# Altium PCB TLE5012.PcbDoc
Units mil, origin at the board's own origin, x right, y up, seen from the top; angles counter-clockwise.
Board outline 1434.62 x 1434.62 mil, 2 copper layers (Top Layer, Bottom Layer); 8 components, 9 nets, 32 pads, 2 vias.
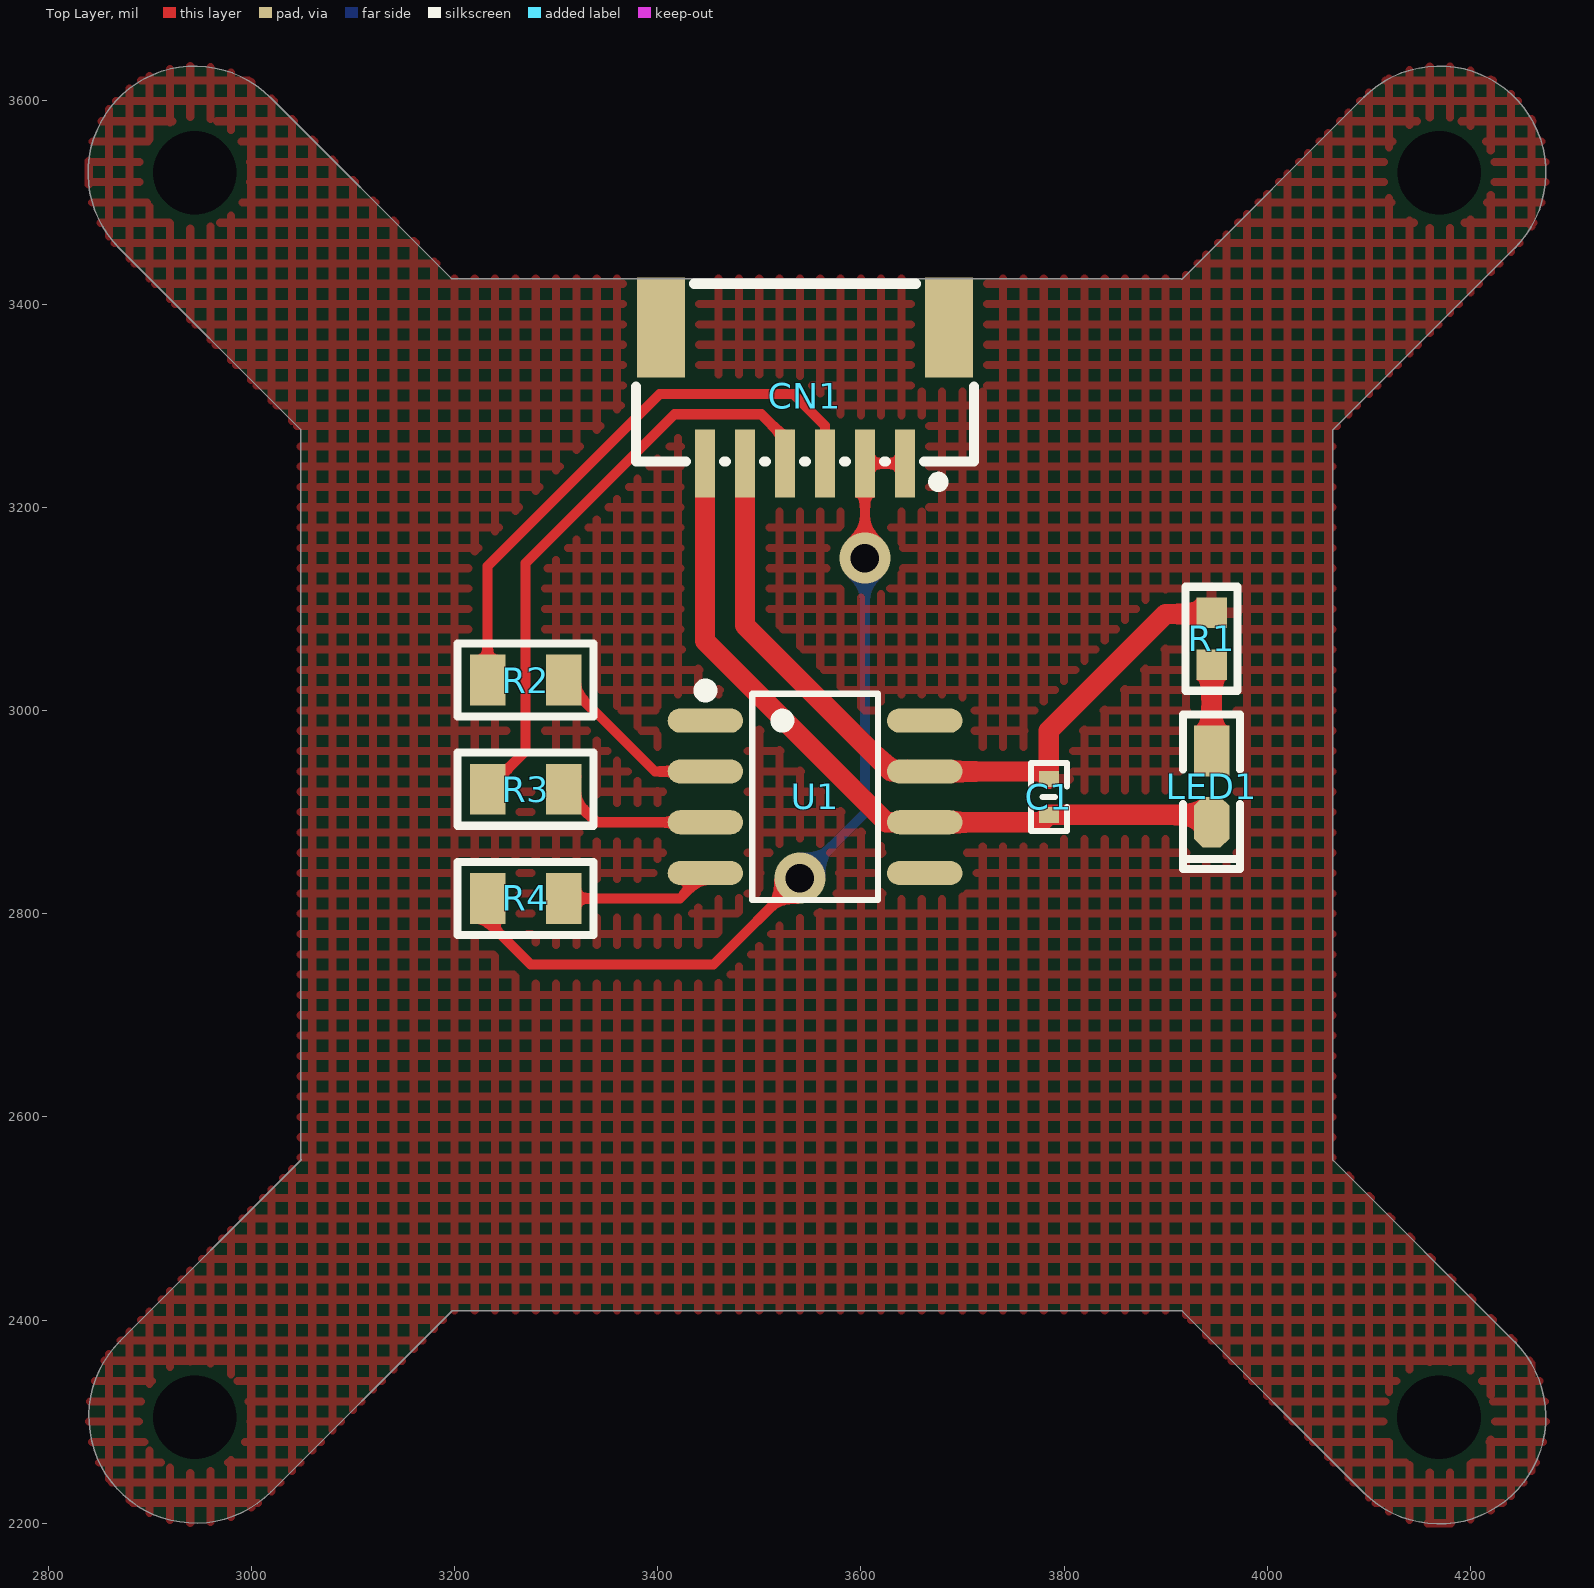
[diagram p0: Top Layer view]
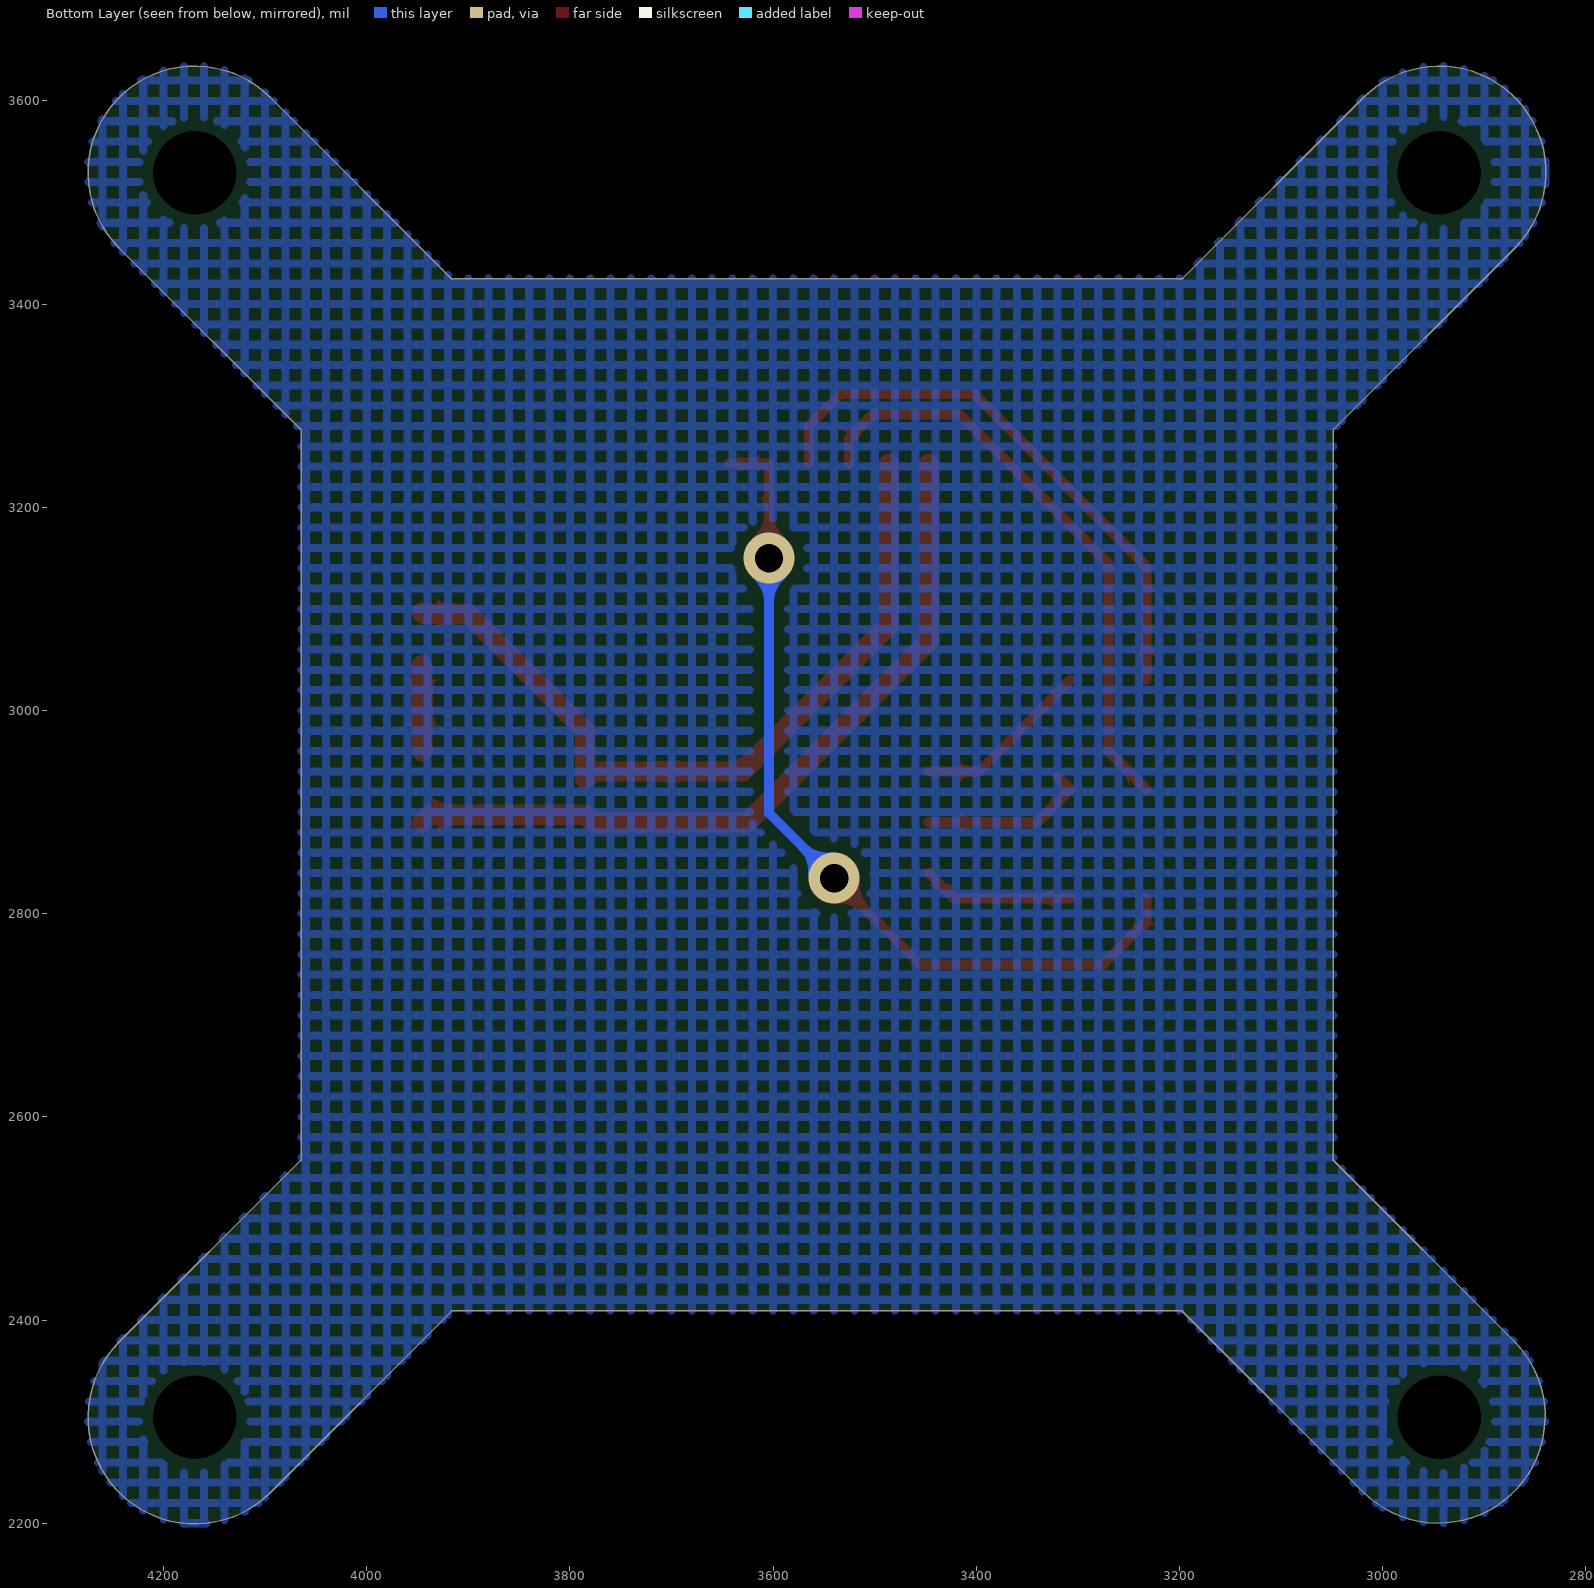
[diagram p1: Bottom Layer view, seen from below]
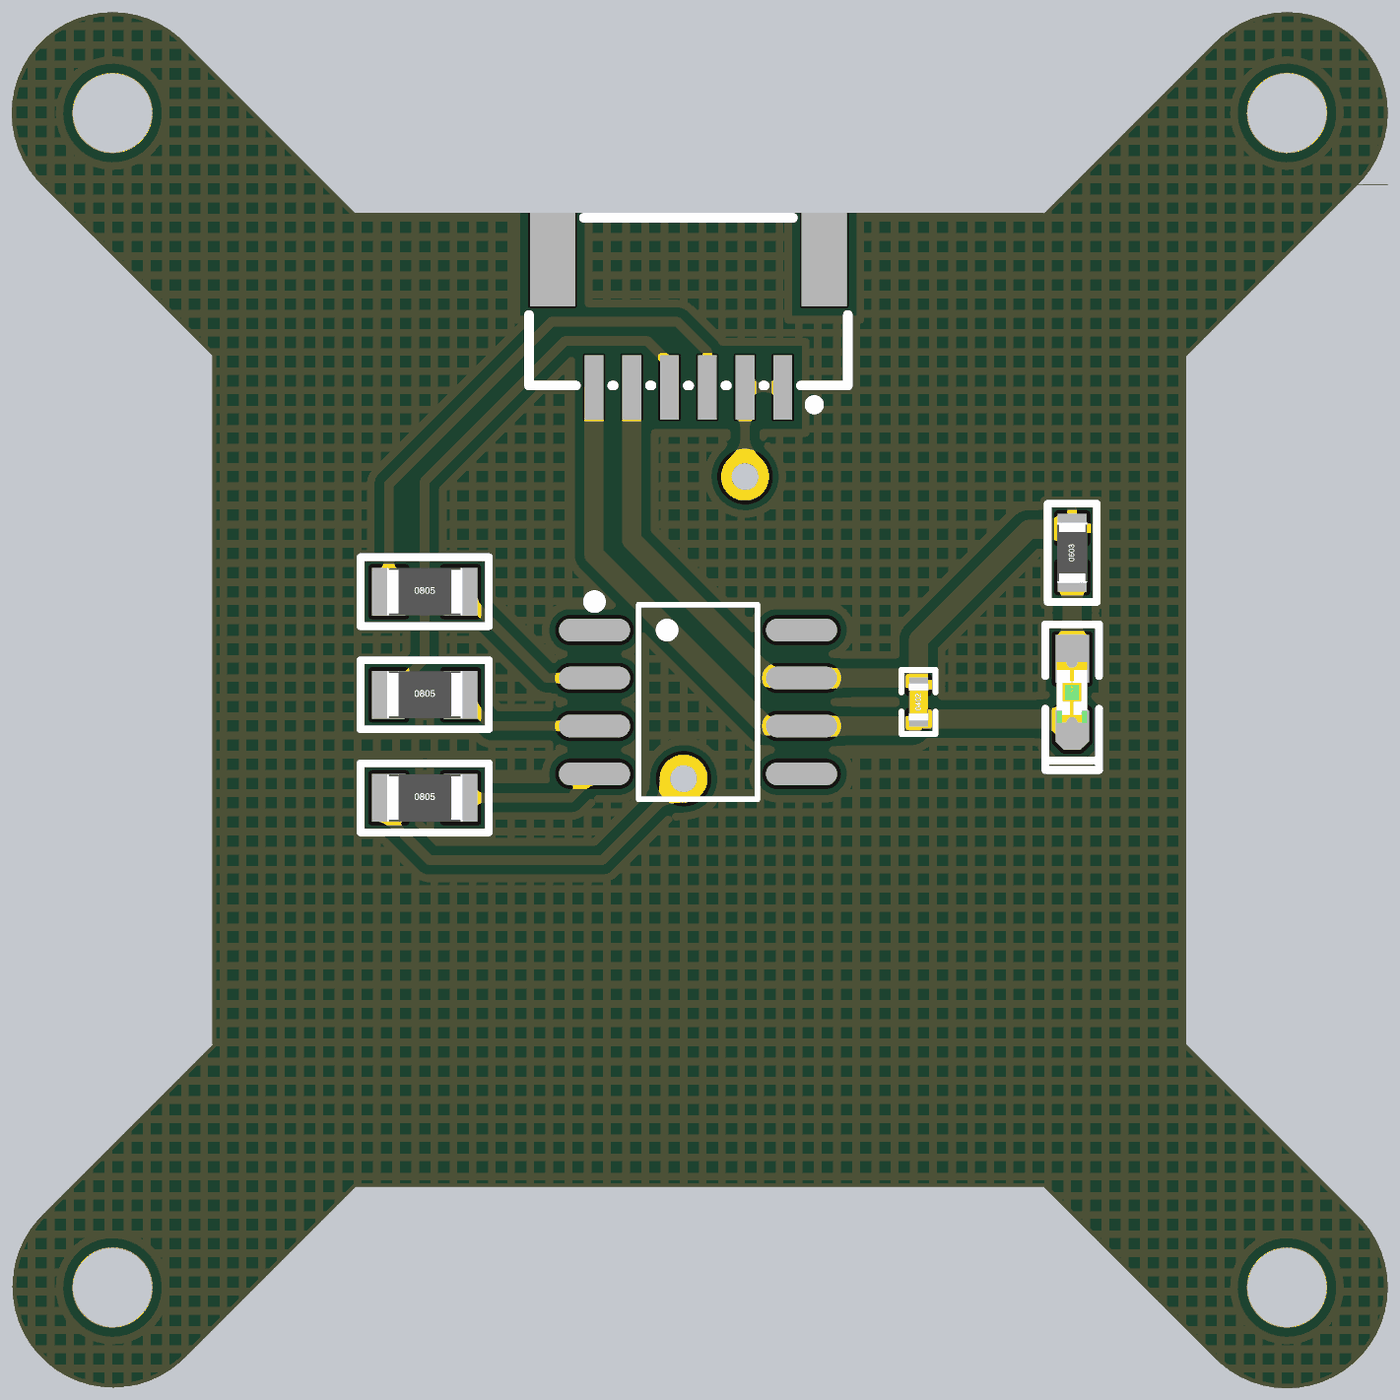
[diagram p2: 3D render of the assembled board from above, using the file's embedded part models]

## Layer stack, top to bottom
Top Solder: solder mask 0.4, Solder Resist, Dk 3.5
Top Layer: signal copper 1.4
Dielectric 1: dielectric 12.6, FR-4, Dk 4.8
Bottom Layer: signal copper 1.4
Bottom Solder: solder mask 0.4, Solder Resist, Dk 3.5

## Board outline
2870.91,2379.4 ccw(c2945.15,2305.15) 3019.4,2230.91 3197.76,2409.27 3915.83,2409.27 3916.63,2408.48 4095,2230.11 ccw(c4169.24,2304.36) 4243.49,2378.6 4065.12,2556.97 4064.33,2557.76 4064.33,3275.83 4242.69,3454.2 4243.51,3455.02 ccw(c4169.27,3529.27) 4095.02,3603.51 4094.2,3602.69 3915.83,3424.33 3915.04,3425.12 3196.97,3425.12 3018.6,3603.49 ccw(c2944.36,3529.24) 2870.11,3455 3048.48,3276.63 3048.48,2558.56 3049.27,2557.76

## Design rules (kind name [scope] priority, off if disabled: settings)
Clearance [All] p1: gap=10 ignorepadtopadclearanceinfootprint=FALSE except(0: Arc-Hole Track-Hole SMDPad-Hole THPad-Hole Via-Hole Fill-Hole Poly-Hole Region-Hole Text-Hole)
PolygonConnect [All] p1: connectstyle=Relief reliefconductorwidth=10 reliefentries=4 polygonreliefangle="90 Angle" airgapwidth=10
RoutingVias [All] p1: holewidth=28 width=50 viastyle="Through Hole" minholewidth=28 minwidth=50 maxholewidth=28 maxwidth=50
SolderMaskExpansion [All] p1: expansion=4
Width [All] p1: maxlimit=30 minlimit=10 preferedwidth=10 minimp=50.000000 maximp=50.000000 favimp=50.000000
30 further rules are at their usual default settings.

## Components (designator, comment, footprint, x,y, rotation, side; value= is the part's Value field where it differs from the comment)
C1 "104" C0402_L 3785,2915 r90 top
CN1 "WAFER-SH1.0-6PWB" SH1.0-6P 3545,3310 r180 top
LED1 "" LED0603_G 3945,2925 r270 top
R1 "100" R0603_L 3945.25,3070.59 r90 top
R2 "100" R0805_L 3270,3030 r0 top
R3 "100" R0805_L 3270,2922.5 r0 top
R4 "470" R0805_L 3270,2815 r0 top
U1 "TLE5012BE1000" PG-DSO-8_L5.0-W4.0-P1.27-LS6.0-BL 3555,2915 r270 top

## Footprints (in the part's own frame and the unit in brackets; to place one, negate y for a bottom-side part, rotate by r counter-clockwise, add the part's x,y. Pads: shape width x height; smd on the part's side, far side on the other; paste and mask are expansions set on the pad)
C0402_L [mm] "无极性贴片电容"
  rect 0.4x0.5 smd: 1(-0.45,0) 2(0.45,0)
  silkscreen extent -0.85,-0.45 0.85,0.45, body extent -0.5,-0.26 0.5,0.26, height 0.53
LED0603_G [mil] "绿色0603LED                                   淘宝ID:黄晶宝石"
  rect 50x35 smd: 1(-35,0.26)
  oct 50x35 smd: 2(35,0.26)
  silkscreen extent -71,-28 81,28, body extent -31,-16 32,16, height 18
PG-DSO-8_L5.0-W4.0-P1.27-LS6.0-BL [mm]
  oval 0.602x1.885 smd: 1(-1.905,-2.742) 2(-0.635,-2.742) 3(0.635,-2.742) 4(1.905,-2.742) 5(1.905,2.742) 6(0.635,2.742) 7(-0.635,2.742) 8(-1.905,2.742)
  silkscreen extent -2.81,-2.89 2.58,1.57
R0603_L [mil] "1/10W贴片电阻                 淘宝ID:黄晶宝石"
  rect 30x30 smd: 1(-25.59,0) 2(25.59,0)
  silkscreen extent -51,-26 51,26, body extent -31,-16 32,16, height 16
R0805_L [mil] "1/8W贴片电阻"
  rect 35x50 smd: 1(-37.4,0) 2(37.4,0)
  silkscreen extent -67,-36 67,36, body extent -39,-25 39,25, height 20
SH1.0-6P [mm]
  rect 0.5x1.7 smd paste+0 mask+0.05: 1(-2.5,1.7) 2(-1.5,1.7) 3(-0.5,1.7) 4(0.5,1.7) 5(1.5,1.7) 6(2.5,1.7)
  rect 1.2x2.5 smd paste+0 mask+0.05: 7(3.6,-1.7) 8(-3.6,-1.7)
  silkscreen extent -4.22,-2.79 4.22,2.29

## Part data
C1: library part C, "贴片电容"
CN1: Current Rating (Max)=1A, JLCPCB Part Class="Extended Part", LCSC Part Name="1x6P ???:1mm ????", Manufacturer=XUNPU(???), Operating Temperature Range=-25??~+85??, Add into BOM=yes, Convert to PCB=yes, Datasheet=https://atta.szlcsc.com/upload/public/pdf/source/20220527/1879B8210BD3B2006BCEAC1A40D397B6.pdf, Device=WAFER-SH1.0-6PWB, Manufacturer Part=WAFER-SH1.0-6PWB, Mounting Style=????, Number of Pins=6P, Number of PINs Per Row=6, Number of Rows=1, Pins Structure=1x6P, Pitch=1mm, Supplier=LCSC, Supplier Footprint=SMD,P=1mm,????, Supplier Part=C3029345, Symbol=WAFER-SH1.0-6PWB
LED1: library part LED-SMD, "贴片LED"
R1 R2 R3 R4: library part R, "贴片电阻"
U1: JLCPCB Part Class="Extended Part", Manufacturer=Infineon(?????), Add into BOM=yes, Convert to PCB=yes, Datasheet=https://atta.szlcsc.com/upload/public/pdf/source/20170728/C123083_1501225763065848823.pdf, Device=TLE5012BE1000, LCSC Part Name=TLE5012BE1000, Manufacturer Part=TLE5012BE1000, Rotation Angle=0??~360??, Supplier=LCSC, Supplier Footprint=SO-8, Supplier Part=C123083, Symbol=TLE5012BE1000XUMA1

## Free pads (board coordinates)
  round 60 hole 82.6: 1(2944.36,2304.36) 1(2944.36,3529.24) 1(4169.24,2304.36) 1(4169.27,3529.27)

## Via types
v1: diameter 50, hole 28, Top Layer to Bottom Layer, 2 vias

## Nets (pads, with @x,y where several pads share a name; then routed paths per layer and width w, separated by ;. In a path a pad name is that pad's centre, name@x,y a point inside that pad or via, vN(x,y) a via of type N, cw(c..) or ccw(c..) an arc to the next point about the centre after c; other vN are vias at no path point)
CSQ: CN1.4 R3.1 | length 588.8
  Top Layer w10: R3.1 3270,2959.9 3270,3145 3416.53,3291.53 3502,3291.53 3525.31,3268.22 CN1.4
DATA: CN1.1 CN1.2 R4.1 | length 856.7
  Top Layer w10: R4.1 3232.6,2792.4 3275,2750 3455,2750 v1(3540,2835) ; v1(3604.05,3150) CN1.2 CN1.1
  Bottom Layer w10: v1(3540,2835) 3604.05,2899.05 v1(3604.05,3150)
GND: C1.2 CN1.5 R1.2 U1.7 | length 776.7
  Top Layer w20: CN1.5 3485.94,3083.74 3629.68,2940 U1.7 3777.72,2940 C1.2 3785,2980.07 3899.93,3095 3944.07,3095 R1.2
NetLED1_1: LED1.1 R1.1 | length 85
  Top Layer w20: LED1.1 R1.1
NetR2_2: R2.2 U1.2 | length 176.9
  Top Layer w10: R2.2 3397.4,2940 U1.2
NetR3_2: R3.2 U1.3 | length 170.8
  Top Layer w10: R3.2@3319.9,2935 R3.2 3339.9,2890 U1.3
NetR4_2: R4.2 U1.4 | length 150
  Top Layer w10: R4.2 3422.03,2815 U1.4
SCK: CN1.3 R2.1 | length 564.5
  Top Layer w10: R2.1 3232.6,3142.04 3402.09,3311.53 3533.47,3311.53 3564.68,3280.32 CN1.3
VCC_3.3V: C1.1 CN1.6 LED1.2 U1.6 | length 753.3
  Top Layer w20: CN1.6 3446.57,3068.43 3625,2890 U1.6 3777.72,2890 C1.1 3937.97,2897.28 LED1.2
pads on no net: CN1.7 CN1.8 U1.1 U1.5 U1.8

## Polygon pours and split planes (outlines as drawn)
GND on Top Layer "Top Layer-No Net" (hatched 90Degree grid 20 track 8, pour order 2): 2870.91,2379.4 ccw(c2945.15,2305.15) 3019.4,2230.91 3197.76,2409.27 3915.83,2409.27 3916.63,2408.48 4095,2230.11 ccw(c4169.24,2304.36) 4243.49,2378.6 4065.12,2556.97 4064.33,2557.76 4064.33,3275.83 4242.69,3454.2 4243.51,3455.02 ccw(c4169.27,3529.27) 4095.02,3603.51 4094.2,3602.69 3915.83,3424.33 3915.04,3425.12 3196.97,3425.12 3018.6,3603.49 ccw(c2944.36,3529.24) 2870.11,3455 3048.48,3276.63 3048.48,2558.56 3049.27,2557.76
GND on Bottom Layer "Top Layer-No Net1" (hatched 90Degree grid 20 track 8, pour order 3): 2870.91,2379.4 ccw(c2945.15,2305.15) 3019.4,2230.91 3197.76,2409.27 3915.83,2409.27 3916.63,2408.48 4095,2230.11 ccw(c4169.24,2304.36) 4243.49,2378.6 4065.12,2556.97 4064.33,2557.76 4064.33,3275.83 4242.69,3454.2 4243.51,3455.02 ccw(c4169.27,3529.27) 4095.02,3603.51 4094.2,3602.69 3915.83,3424.33 3915.04,3425.12 3196.97,3425.12 3018.6,3603.49 ccw(c2944.36,3529.24) 2870.11,3455 3048.48,3276.63 3048.48,2558.56 3049.27,2557.76

## Silkscreen, mask and mechanical layers (free items; w line width, h text height)
Mechanical 1:
  lines w10: 3048.48,2558.56 3048.48,3276.63 2870.11,3455 cw(c2944.36,3529.24) 3018.6,3603.49 3196.97,3425.12 3915.04,3425.12 ; 3049.27,2557.76 2870.91,2379.4 ccw(c2945.15,2305.15) 3019.4,2230.91 3197.76,2409.27 3915.83,2409.27 ; 3915.83,3424.33 4094.2,3602.69 ; 3916.63,2408.48 4095,2230.11 ccw(c4169.24,2304.36) 4243.49,2378.6 4065.12,2556.97 ; 4064.33,2557.76 4064.33,3275.83 4242.69,3454.2 ; 4095.02,3603.51 cw(c4169.27,3529.27) 4243.51,3455.02